# EAGLE board Tugas Day 0- Fadhil Sibarani (EAGLE 7.5.0)
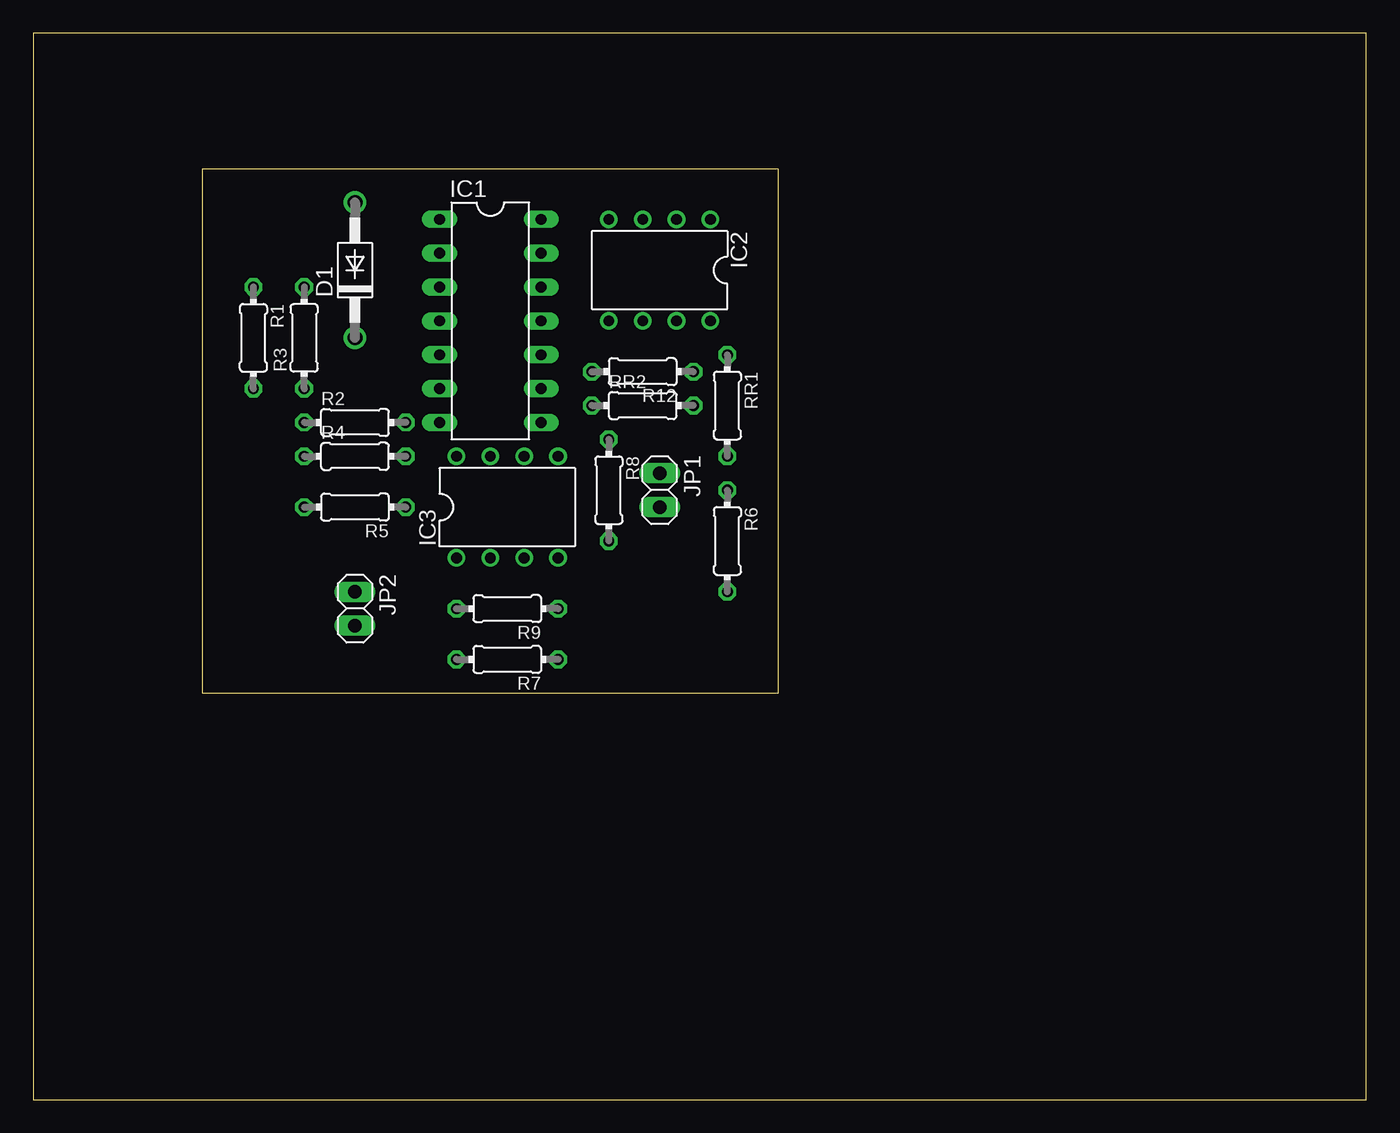
[diagram p0: board, top side]
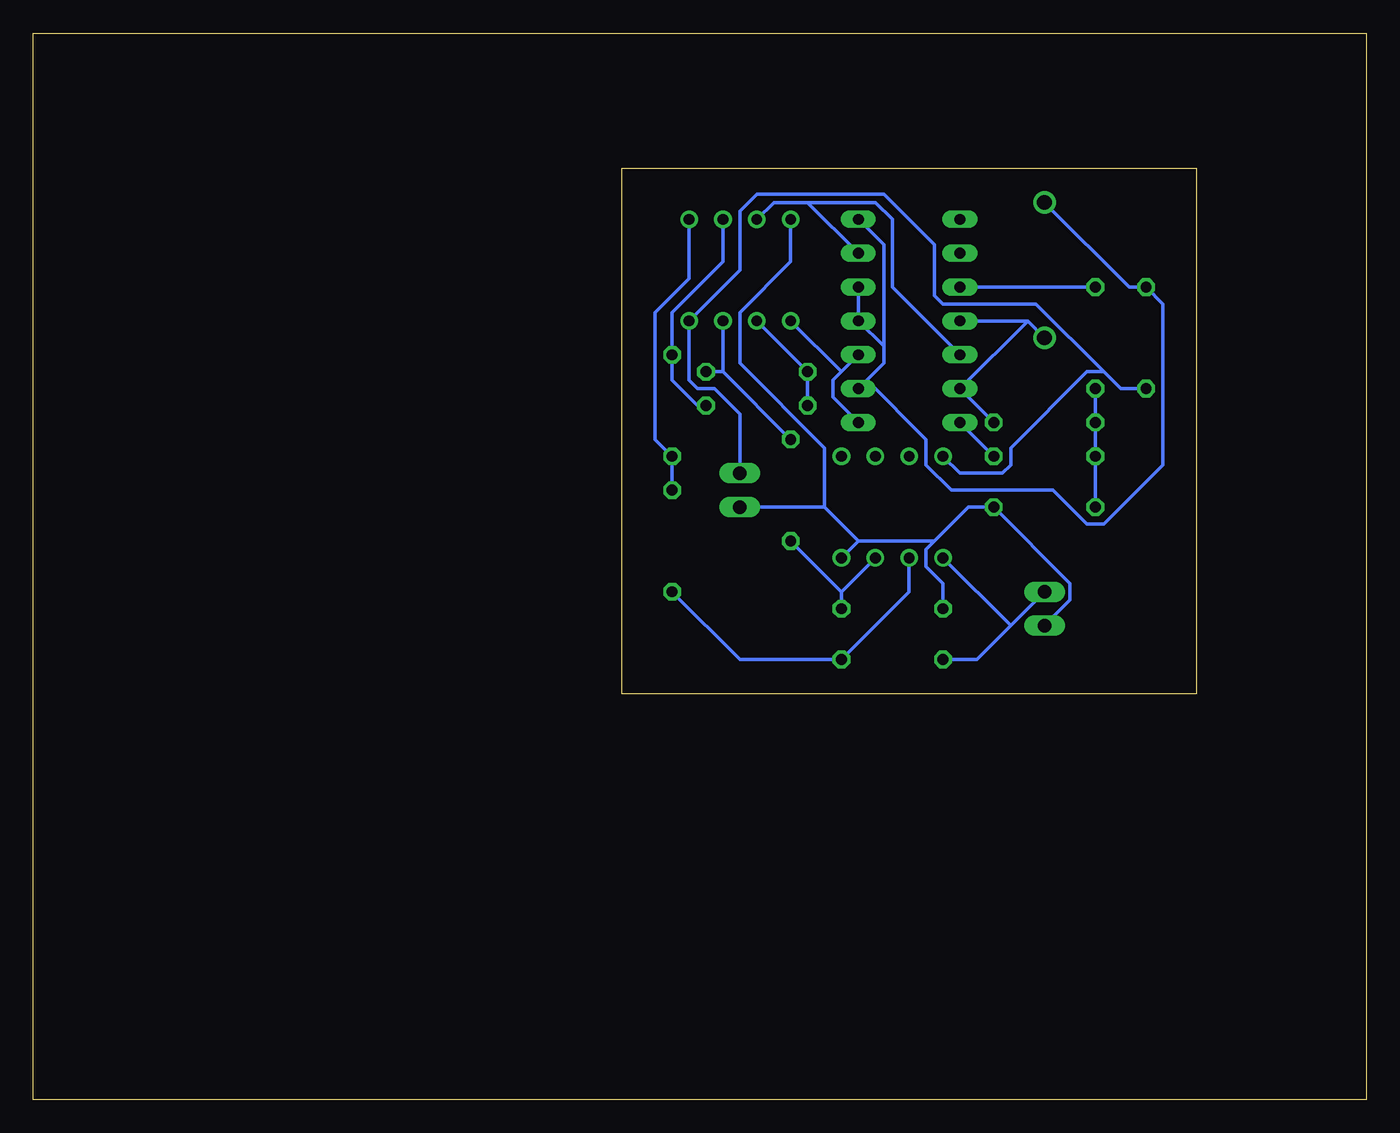
[diagram p1: board, bottom side, seen from below]

Size 100 x 80 mm. Coordinates in mm from the lower left corner, seen from the top.
Outline: 0,0 100,0 100,80 0,80 0,0
Outline: 12.7,69.85 55.88,69.85 55.88,30.48 12.7,30.48 12.7,69.85
Copper layers (1*16): Top 0.035mm / dielectric 1.5mm / Bottom 0.035mm
Design rules "default *": minimum track width 11mil, minimum drill 24mil, track to track 12mil, track to pad 8mil, pad to pad 8mil, via to via 8mil, smd to smd 8mil, copper to edge 40mil, drill to drill 8mil, minimum pad ring 10mil, minimum via ring 8mil, stop-mask expansion 4mil, vias tented up to drill 0mil, thermal gap 10mil

## Footprints (pad centres in the part's own frame; a part is rotated, then mirrored left to right if it is on the bottom)
DO41-10 = drill 1.118: A 5.08,0; C -5.08,0
DIL14 = drill 0.813 long: 1 -7.62,-3.81; 2 -5.08,-3.81; 3 -2.54,-3.81; 4 0,-3.81; 5 2.54,-3.81; 6 5.08,-3.81; 7 7.62,-3.81; 8 7.62,3.81; 9 5.08,3.81; 10 2.54,3.81; 11 0,3.81; 12 -2.54,3.81; 13 -5.08,3.81; 14 -7.62,3.81
DIL08 = drill 0.813 pad 1.27: 1 -3.81,-3.81; 2 -1.27,-3.81; 3 1.27,-3.81; 4 3.81,-3.81; 5 3.81,3.81; 6 1.27,3.81; 7 -1.27,3.81; 8 -3.81,3.81
1X02 = drill 1.016 long: 1 -1.27,0; 2 1.27,0
0204/7 = drill 0.813 octagon: 1 -3.81,0; 2 3.81,0

## Placement (x,y rotation side)
D1  1N4004  [DO41-10]  24.13,62.23 90 top
IC1  CA3046  [DIL14]  34.29,58.42 270 top
IC2  LM358N  [DIL08]  46.99,62.23 180 top
IC3  LM358N  [DIL08]  35.56,44.45 0 top
JP1  MALE_HEADER 1  [1X02]  46.99,45.72 270 top
JP2  MALE_HEADER 2  [1X02]  24.13,36.83 270 top
R1  60K  [0204/7]  16.51,57.15 270 top
R2  12K  [0204/7]  24.13,50.8 0 top
R3  100K  [0204/7]  20.32,57.15 90 top
R4  200K  [0204/7]  24.13,48.26 0 top
R5  60K  [0204/7]  24.13,44.45 180 top
R6  100K  [0204/7]  52.07,41.91 270 top
R7  100K  [0204/7]  35.56,33.02 180 top
R8  100K  [0204/7]  43.18,45.72 270 top
R9  100K  [0204/7]  35.56,36.83 180 top
R12  100K  [0204/7]  45.72,54.61 180 top
RR1  100K  [0204/7]  52.07,52.07 270 top
RR2  1K  [0204/7]  45.72,52.07 0 top

## Library data of the parts
D1 = diode
IC1 = ic-package
IC2 IC3 = linear
JP1 JP2 = pinhead
R1-R9 R12 RR1 RR2 = rcl

## Nets
GND: IC2.4 IC3.4 JP1.2 JP2.2 R5.1 R9.2
N$1: IC2.6 R12.2 RR2.1
N$2: IC2.7 R8.1 R12.1
N$3: R2.1 R3.1 R4.1 R5.2
N$4: D1.C IC1.4 IC1.6 R2.2
N$6: IC1.3 R3.2
N$7: IC1.7 R4.2
N$8: IC1.8 IC1.10 IC2.5
N$9: IC2.2 RR1.1 RR2.2
N$10: IC1.5 IC1.13 IC2.3
N$12: IC2.1 R6.1 RR1.2
N$13: IC3.3 R8.2 R9.1
N$14: IC3.2 R6.2 R7.1
N$16: D1.A IC1.9 IC1.11 IC1.12 IC1.14 R1.1
VCC: IC2.8 IC3.8 JP1.1 R1.2
VOUT: IC3.1 JP2.1 R7.2

## Tracks (layer width: path | path; a pad name or v marks a point on that pad's centre or on a via)
GND
  Bottom 0.279: R9.2 31.75,38.73 33.02,40.01 33.02,41.27 32.38,41.91 | 32.38,41.91 29.84,44.45 R5.1 22.23,38.73 22.23,37.47 JP2.2 | 38.1,41.91 IC3.4 | 32.38,41.91 38.1,41.91 | IC2.4 43.18,62.87 46.99,59.05 46.99,55.24 40.64,48.9 40.64,44.45 | 38.1,41.91 40.64,44.45 | 40.64,44.45 JP1.2
N$1
  Bottom 0.279: RR2.1 R12.2 IC2.6
N$2
  Bottom 0.279: 48.26,54.61 R8.1 | R12.1 48.26,54.61 | 48.26,54.61 IC2.7
N$3
  Bottom 0.279: R3.1 R2.1 R4.1 R5.2
N$4
  Bottom 0.279: R2.2 IC1.6 25.4,58.42 | 25.4,58.42 IC1.4 | D1.C 25.4,58.42
N$6
  Bottom 0.279: IC1.3 R3.2
N$7
  Bottom 0.279: IC1.7 R4.2
N$8
  Bottom 0.279: IC1.8 40.01,52.7 40.01,53.98 39.37,54.61 | IC1.10 39.37,54.61 | 39.37,54.61 IC2.5
N$9
  Bottom 0.279: RR2.2 50.16,52.07 52.07,53.98 RR1.1 52.07,59.05 48.26,62.87 IC2.2
N$10
  Bottom 0.279: IC1.5 35.56,60.96 35.56,66.04 36.83,67.31 41.91,67.31 | 41.91,67.31 44.45,67.31 IC2.3 | 41.91,67.31 IC1.13
N$12
  Bottom 0.279: R6.1 RR1.2 53.34,49.53 53.34,59.05 50.8,61.59 IC2.1
N$13
  Bottom 0.279: 39.37,38.1 R9.1 | IC3.3 39.37,38.1 | 39.37,38.1 R8.2
N$14
  Bottom 0.279: R6.2 46.99,33.02 R7.1 34.29,38.1 IC3.2
N$16
  Bottom 0.279: 37.47,53.98 36.2,55.24 36.2,56.52 | 36.2,56.52 IC1.11 IC1.12 | IC1.14 36.2,64.14 36.2,56.52 | D1.A 17.78,60.96 R1.1 15.24,59.69 15.24,47.62 19.68,43.18 20.95,43.18 23.5,45.72 31.11,45.72 33.02,47.62 33.02,49.53 37.47,53.98 | 37.47,53.98 IC1.9
VCC
  Bottom 0.279: JP1.1 46.99,51.44 48.9,53.34 50.16,53.34 50.8,53.98 IC2.8 46.99,62.23 46.99,66.67 45.72,67.94 36.2,67.94 32.38,64.14 32.38,60.33 31.75,59.69 24.77,59.69 19.68,54.61 | R1.2 18.41,53.34 19.68,54.61 | 19.68,54.61 20.95,54.61 26.67,48.9 26.67,47.62 27.3,46.99 30.48,46.99 IC3.8
VOUT
  Bottom 0.279: R7.2 29.21,33.02 26.67,35.56 | JP2.1 26.67,35.56 | 26.67,35.56 IC3.1